# Altium PCB PCB1.PcbDoc
Units mil, origin at the board's own origin, x right, y up, seen from the top; angles counter-clockwise.
Board outline 850 x 2800 mil, 2 copper layers (Top Layer, Bottom Layer); 11 components, 11 nets, 49 pads, 0 vias.
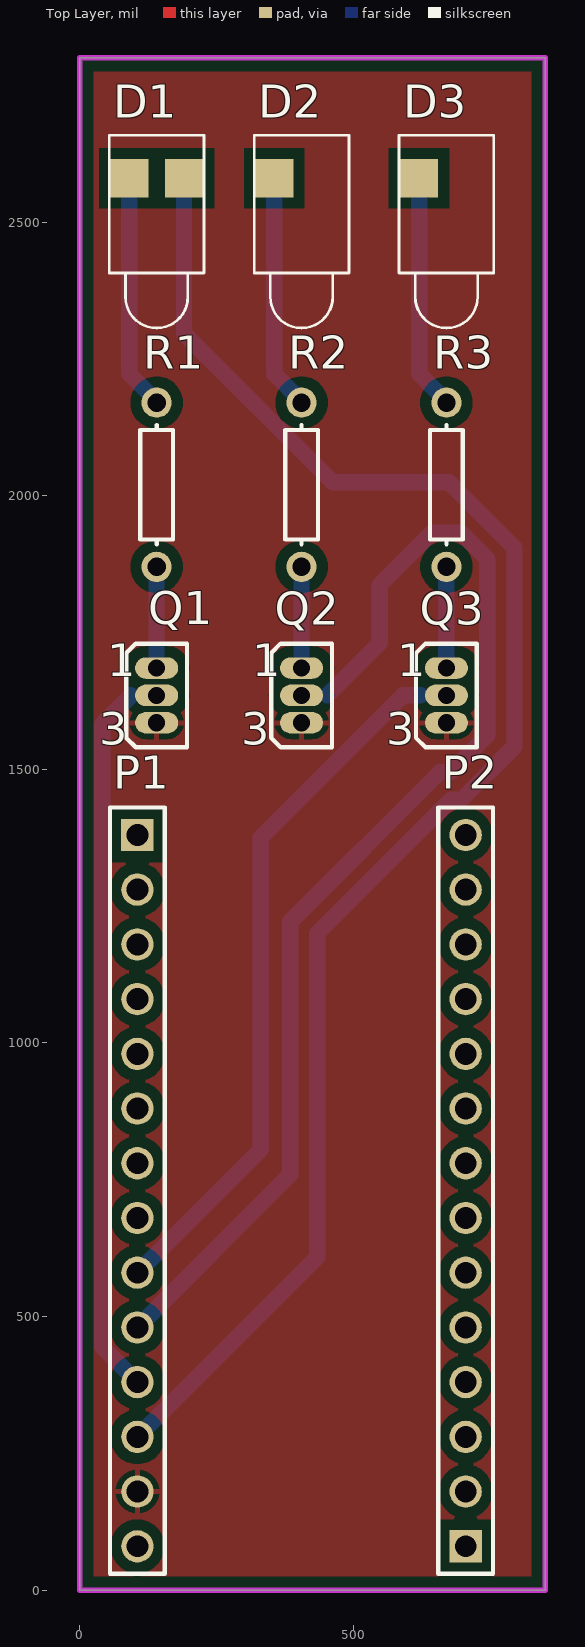
[diagram p0: Top Layer view]
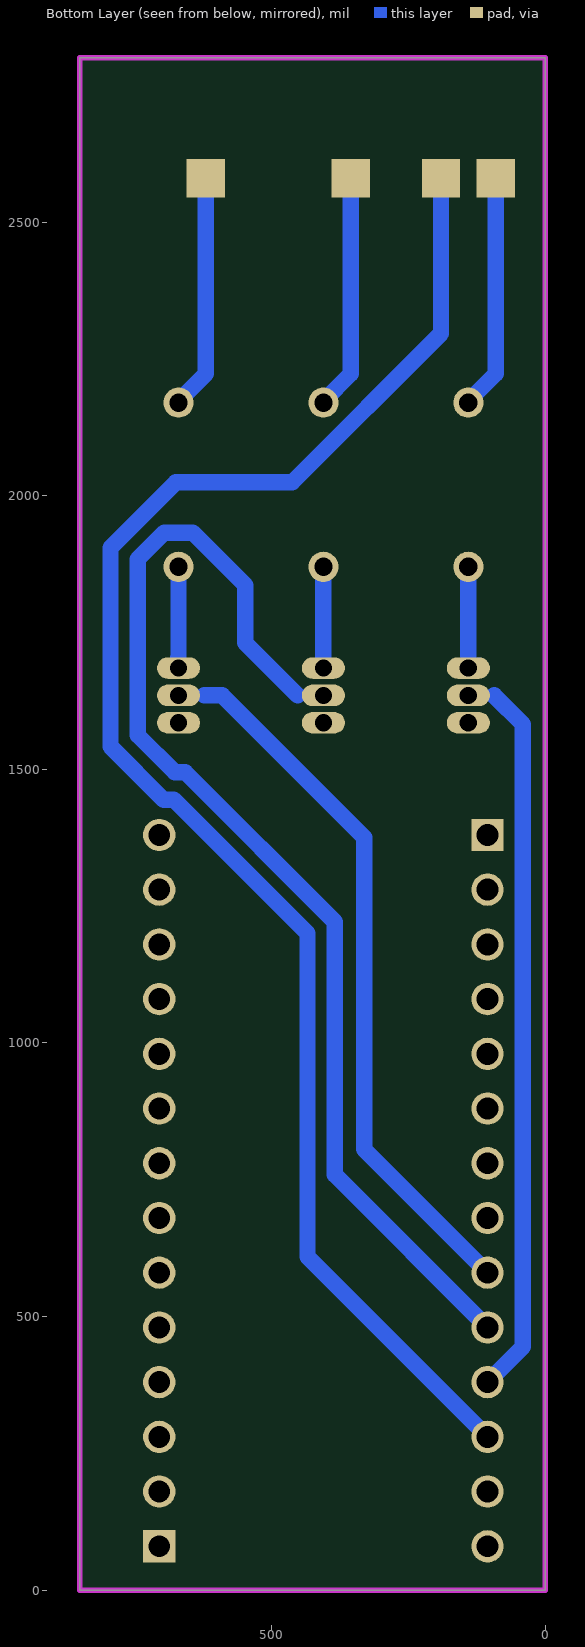
[diagram p1: Bottom Layer view, seen from below]

## Layer stack, top to bottom
Top Solder: solder mask 0.4, Solder Resist, Dk 3.5
Top Layer: signal copper 1.4
Dielectric 1: dielectric 12.6, FR-4, Dk 4.8
Bottom Layer: signal copper 1.4
Bottom Solder: solder mask 0.4, Solder Resist, Dk 3.5

## Board outline
0,0 850,0 850,2800 0,2800

## Design rules (kind name [scope] priority, off if disabled: settings)
BoardOutlineClearance [All] p1: gap=12 ignorepadtopadclearanceinfootprint=FALSE
Clearance [All] p1: gap=20 ignorepadtopadclearanceinfootprint=TRUE except(24: Arc-Via Track-Via SMDPad-Via THPad-Via Via-Via Via-Fill Via-Poly Via-Region Via-Text Via-Hole)
DiffPairsRouting [All] p1: maxlimit=10 minlimit=7 mostfreqgap=10 toplayer_minwidth=6 toplayer_maxwidth=15 toplayer_prefwidth=8 bottomlayer_minwidth=6 bottomlayer_maxwidth=15 bottomlayer_prefwidth=8 maxuncoupledlength=500
HoleSize [All] p1: absolutevalues=TRUE maxlimit=1000 minlimit=39.37 maxpercent=80.000 minpercent=20.000
HoleToHoleClearance [All] p1: gap=17 allowstackedmicrovias=TRUE
MinimumAnnularRing [All] p1: minimumring=17
PolygonConnect [All] p1: connectstyle=Relief reliefconductorwidth=10 reliefentries=4 polygonreliefangle="90 Angle" airgapwidth=10
RoutingVias [All] p1: holewidth=30 width=35 viastyle="Through Hole" minholewidth=10 minwidth=11 maxholewidth=255 maxwidth=250
SilkToSilkClearance [All] p1: silktosilkclearance=0
SolderMaskExpansion SolderMaskExpansion_1 [All] p1: expansion=4 istentingtop=FALSE
Width [All] p1: maxlimit=10000 minlimit=30 preferedwidth=50 minimp=50.000000 maximp=50.000000 favimp=50.000000
26 further rules are at their usual default settings.

## Components (designator, comment, footprint, x,y, rotation, side; value= is the part's Value field where it differs from the comment)
D1 "LED_R" LED-1#1 140.18,2580 r270 top
D2 "LED_G" LED-1#2 405,2580 r270 top
D3 "LED_B" LED-1#2 669.82,2580 r270 top
P1 "Header 14" HDR1X14 105,1380 r270 top
P2 "Header 14" HDR1X14 705,80 r90 top
Q1 "MOSFET-N" E3 140.18,1635 r0 top
Q2 "MOSFET-N" E3 405,1635 r0 top
Q3 "MOSFET-N" E3 669.82,1635 r0 top
R1 "Res1" AXIAL-0.3 140.18,2020 r90 top value=7
R2 "Res1" AXIAL-0.3 405,2020 r90 top value=4
R3 "Res1" AXIAL-0.3 669.82,2020 r90 top value=4

## Footprints (in the part's own frame and the unit in brackets; to place one, negate y for a bottom-side part, rotate by r counter-clockwise, add the part's x,y. Pads: shape width x height; smd on the part's side, far side on the other; paste and mask are expansions set on the pad)
AXIAL-0.3 [mm] "Axial Device, Thru-Hole; 2 Leads; 0.3 in Pin Spacing"
  round 1.4 hole 0.85: 1(-3.81,0) 2(3.81,0)
  silkscreen extent -2.77,-0.76 2.77,0.76
E3 [mm] "TO, Flat Index; 3 In-Line, Axial Leads; Body Dia. 4.6mm; Lead Dia. 0.5 mm (max)"
  oval 2x1 hole 0.8: 1(0,1.27) 2(0,0) 3(0,-1.27)
  silkscreen extent -1.41,-2.41 1.41,2.41
HDR1X14 [mm] "Connector; Header; 14 Position"
  rect 1.5x1.5 hole 1.016: 1(0,0)
  round 1.5 hole 1.016: 2(2.54,0) 3(5.08,0) 4(7.62,0) 5(10.16,0) 6(12.7,0) 7(15.24,0) 8(17.78,0) 9(20.32,0) 10(22.86,0) 11(25.4,0) 12(27.94,0) 13(30.48,0) 14(33.02,0)
  silkscreen extent -1.27,-1.27 34.29,1.27
LED-1#1 [mil] "LED; 2 Leads"
  rect 70x70 all layers, no hole: 1(0,50) 2(0,-50)
  silkscreen extent -79,-87 274,87
LED-1#2 [mil] "LED; 2 Leads"
  round 0 all layers, no hole: 1(0,50)
  rect 70x70 all layers, no hole: 2(0,-50)
  silkscreen extent -79,-87 274,87

## Part data
D1 D2 D3: library part LED0, "Typical INFRARED GaAs LED", LatestRevisionDate=08-Jul-2005, LatestRevisionNote="Mech Layer 1 removed.", PackageDescription="LED; 2 Leads", PackageReference=LED-0, Published=8-Jun-2000, Publisher="Altium Limited"
P1 P2: "Header, 14-Pin", LatestRevisionDate=17-Jul-2002, LatestRevisionNote="Re-released for DXP Platform.", Publisher="Altium Limited"
Q1 Q2 Q3: "N-Channel MOSFET", LatestRevisionDate=17-Jul-2002, LatestRevisionNote="Re-released for DXP Platform.", PackageDescription="TO, Flat Index; 3 In-Line, Axial Leads; Body Dia. 4.6mm; Lead Dia. 0.5 mm (max)", PackageReference=E3, PackageVersion=1995/1996, Published=8-Jun-2000, Publisher="Altium Limited"
R1 R2 R3: "Resistor", LatestRevisionDate=17-Jul-2002, LatestRevisionNote="Re-released for DXP Platform.", PackageDescription="Axial Device, Thru-Hole; 2 Leads; 0.3 in Pin Spacing", PackageReference=AXIAL-0.3, Published=8-Jun-2000, Publisher="Altium Limited"

## Nets (pads, with @x,y where several pads share a name; then routed paths per layer and width w, separated by ;. In a path a pad name is that pad's centre, name@x,y a point inside that pad or via, vN(x,y) a via of type N, cw(c..) or ccw(c..) an arc to the next point about the centre after c; other vN are vias at no path point)
+5: D1.1 P1.12 | length 2971.1
  Bottom Layer w30: P1.12 434.06,609.06 434.06,1200.32 678.27,1444.53 697.08,1444.53 794.19,1541.64 794.19,1904.81 674.56,2024.45 462.08,2024.45 190.18,2296.35 D1.1
GND: P1.13 Q1.3 Q2.3 Q3.3
NetD1_2: D1.2 R1.2 | length 430.7
  Bottom Layer w30: D1.2 90.18,2222.61 140.18,2172.61 R1.2
NetD2_2: D2.2 R2.2 | length 430.7
  Bottom Layer w30: D2.2 355,2222.61 405,2172.61 R2.2
NetD3_2: D3.2 R3.2 | length 430.7
  Bottom Layer w30: D3.2 619.82,2222.61 669.82,2172.61 R3.2
NetP1_9: P1.9 Q3.2 | length 1288.7
  Bottom Layer w30: P1.9 330.28,805.28 330.28,1375.28 590,1635 622.8,1635
NetP1_10: P1.10 Q2.2 | length 2177.3
  Bottom Layer w30: P1.10 384.06,759.06 384.06,1221.03 657.56,1494.53 676.37,1494.53 744.19,1562.35 744.19,1884.1 695.74,1932.56 643.91,1932.56 547.97,1836.61 547.97,1730.94 452.02,1635
NetP1_11: P1.11 Q1.2 | length 1303.6
  Bottom Layer w30: 93.16,1635 40.47,1582.32 40.47,444.53 P1.11
NetQ1_1: Q1.1 R1.1 | length 165.2
  Bottom Layer w30: Q1.1@120,1689.69 Q1.1@122.43,1689.69 ; 140,1707.26 140,1869.82 R1.1
NetQ2_1: Q2.1 R2.1 | length 165
  Bottom Layer w30: 405,1705 R2.1
NetQ3_1: Q3.1 R3.1 | length 165.1
  Bottom Layer w30: R3.1 669.82,1705.18 670,1705
pads on no net: D2.1 D3.1 P1.1 P1.2 P1.3 P1.4 P1.5 P1.6 P1.7 P1.8 P1.14 P2.1 P2.2 P2.3 P2.4 P2.5 P2.6 P2.7 P2.8 P2.9 P2.10 P2.11 P2.12 P2.13 P2.14

## Polygon pours and split planes (outlines as drawn)
GND on Top Layer "GND_L01_P000" (solid, pour order 0): 25,25 25,2775 825,2775 825,25

## Keep-outs
Keep-Out Layer:
  the board outline again, w10

## Text inside footprints (layer, text, board x,y; h text height)
Q1: Top Overlay "3" at 35,1545 h59.05; Top Overlay "1" at 50,1670 h59.05
Q2: Top Overlay "3" at 295,1545 h59.05; Top Overlay "1" at 315,1670 h59.05
Q3: Top Overlay "3" at 560,1545 h59.05; Top Overlay "1" at 580,1670 h59.05